# EAGLE board Qwiic RFID - IDXXLA-TopJig (EAGLE 9.2.1)
REVISION: A

Size 43.35 x 43.56 mm. Coordinates in mm from the lower left corner, seen from the top.
Outline: 34.88,41.55 0,41.55 0,37.72 10.24,37.72 arc180 8.47,35.94 8.47,33.4 arc-100 5.93,30.86 5.16,30.86 arc-80 2.62,33.4 2.62,41.02 arc-80 5.16,43.56 38.18,43.56 arc-80 40.72,41.02 40.72,2.92 arc-80 38.18,0.38 5.16,0.38 arc-80 2.62,2.92 2.62,9.27 arc-80 5.16,13.08 5.93,13.08 arc-100 8.47,10.54 8.47,8 arc180 10.24,6.22 0,6.22 0,0 11.77,0 11.77,6.22 33.1,6.22 arc180 34.88,8 34.88,34.41 43.35,34.41 43.35,37.72
Outline: 43.35,37.72 43.35,41.55 34.88,41.55
Outline: 43.35,37.72 33.1,37.72 arc-180 34.88,35.94 34.88,41.55
Copper layers (1*16): Top 0.035mm / dielectric 1.5mm / Bottom 0.035mm
Design rules "SparkFun-2-layer-PCBWay-LIMIT": minimum track width 6mil, minimum drill 0.3mm, track to track 6mil, track to pad 6mil, pad to pad 6mil, via to via 6mil, smd to smd 6mil, copper to edge 6mil, drill to drill 6mil, minimum pad ring 6mil, minimum via ring 6mil, stop-mask expansion 4mil, vias tented up to drill 25mil, thermal gap 10mil
Net classes: 1 power: width 0.203 mm

## Footprints (pad centres in the part's own frame; a part is rotated, then mirrored left to right if it is on the bottom)
STAND-OFF-TIGHT = hole 3.048: 0,0
NUBBIN_LOCKER = hole 2.794: 0,0

## Placement (x,y rotation side)
E$1  [STAND-OFF-TIGHT]  5.8,6.73 0 top
E$2  [STAND-OFF-TIGHT]  5.8,37.21 0 top
E$3  [STAND-OFF-TIGHT]  37.55,6.73 0 top
E$4  [STAND-OFF-TIGHT]  37.55,37.21 0 top
E$5  [NUBBIN_LOCKER]  21.67,2.41 0 top
E$6  [NUBBIN_LOCKER]  21.67,41.53 0 top
FRAME1  FRAME-LETTER  [CREATIVE_COMMONS]  0.08,-3.43 0 top  (outside the outline)

## Library data of the parts
E$1-E$6 = SparkFun-Hardware
FRAME1 = SparkFun-Aesthetics

## Text on the board
Top: Up-TopLayer
Bottom: Down-TopLayer
tPlace: #666 | Qwiic RFID | SPX-14867
Measures: Units in Inches
tDocu: Elias Santistevan